# Altium PCB PCB2_other1.PcbDoc
Units mil, origin at the board's own origin, x right, y up, seen from the top; angles counter-clockwise.
Board outline 6000 x 4000 mil, 2 copper layers (Top Layer, Bottom Layer); 10 components, 7 nets, 21 pads, 0 vias.
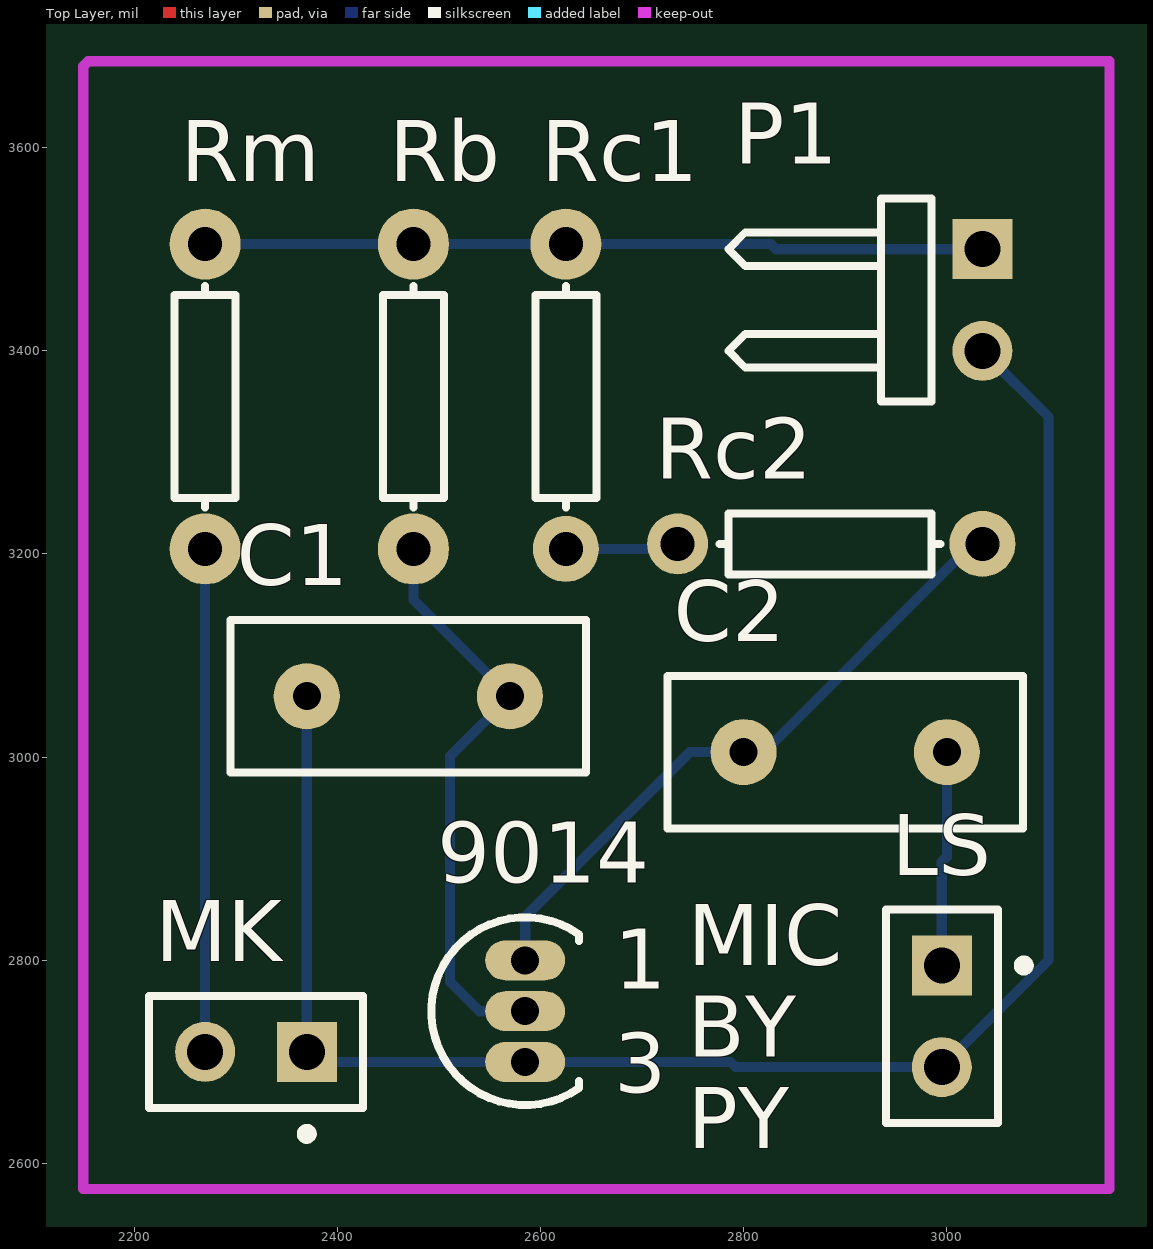
[diagram p0: Top Layer view]
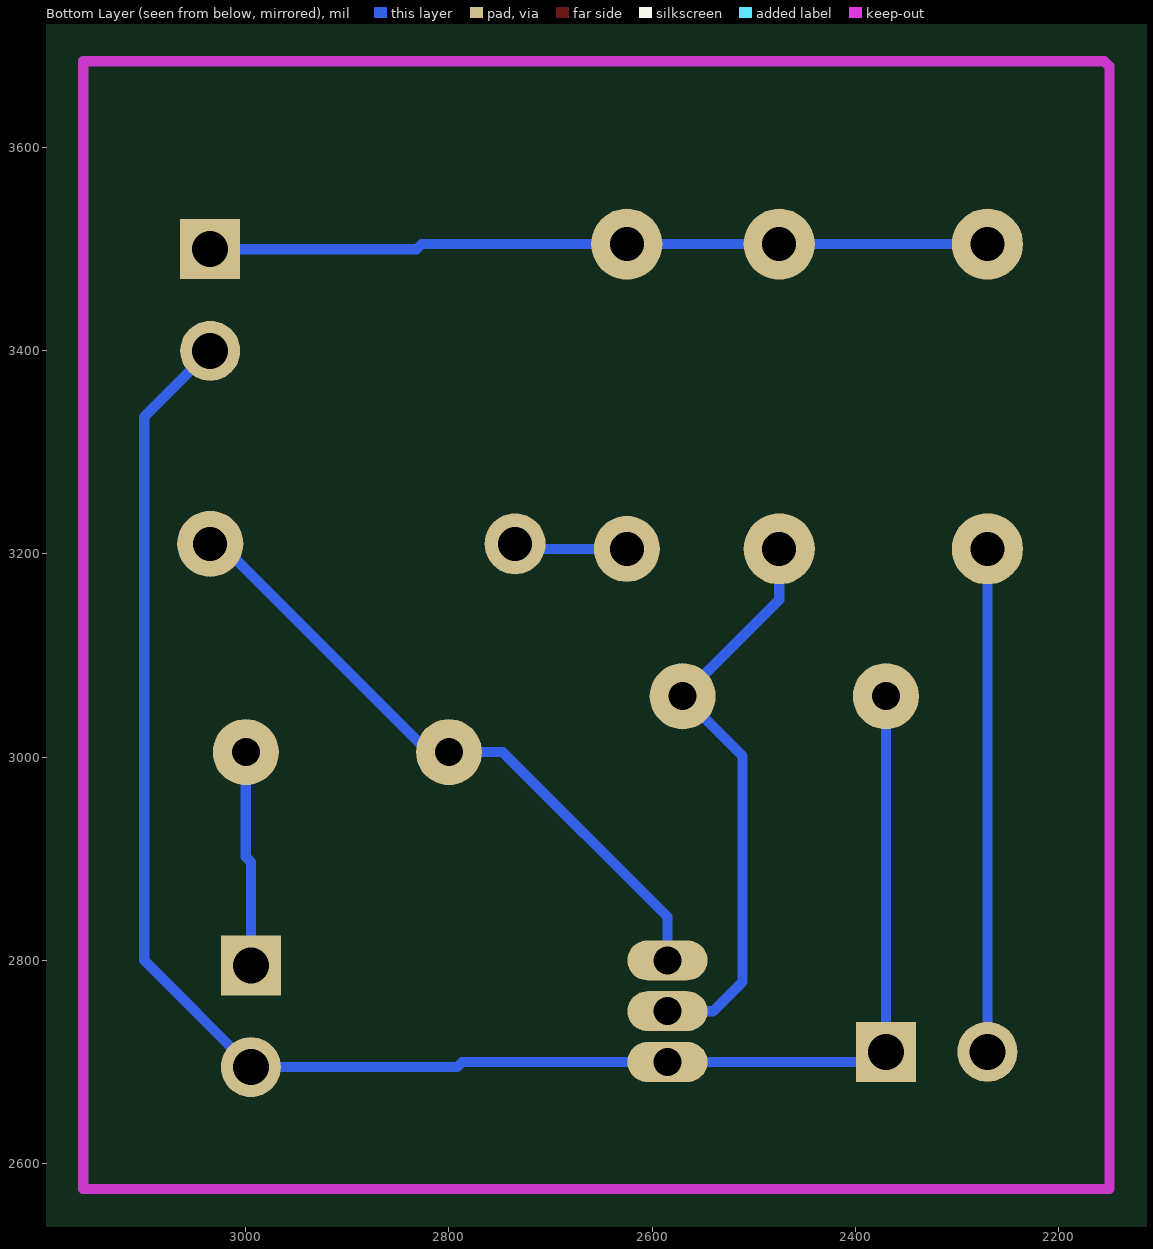
[diagram p1: Bottom Layer view, seen from below]

## Layer stack, top to bottom
Top Solder: solder mask 0.4, Solder Resist, Dk 3.5
Top Layer: signal copper 1.4
Dielectric 1: dielectric 12.6, FR-4, Dk 4.8
Bottom Layer: signal copper 1.4
Bottom Solder: solder mask 0.4, Solder Resist, Dk 3.5

## Board outline
1000,1000 7000,1000 7000,5000 1000,5000

## Design rules (kind name [scope] priority, off if disabled: settings)
Clearance [All] p1: gap=10
PolygonConnect [All] p1: connectstyle=Relief reliefconductorwidth=10 reliefentries=4 polygonreliefangle="90 Angle" airgapwidth=10
RoutingLayers [All] p1: top layer_v5=FALSE bottom layer_v5=TRUE
RoutingVias [All] p1: holewidth=28 width=50 viastyle="Through Hole" minholewidth=28 minwidth=50 maxholewidth=28 maxwidth=50
SolderMaskExpansion [All] p1: expansion=4
Width [All] p1: maxlimit=10 minlimit=10 preferedwidth=10
29 further rules are at their usual default settings.

## Components (designator, comment, footprint, x,y, rotation, side; value= is the part's Value field where it differs from the comment)
9014 "NPN" TO-92 2585,2750 r0 top
C1 "1uf" RAD-0.2 2470,3060 r0 top
C2 "10uf" RAD-0.2 2900,3005 r0 top
LS "Bell" PIN2 2995,2795 r270 top
MK "Mic2" PIN2 2370,2710 r180 top
P1 "Header 2H" HDR1X2H 3035,3500 r270 top
Rb "30k" AXIAL-0.3#1 2475,3355 r270 top
Rc1 "180" AXIAL-0.3#2 2625,3355 r270 top
Rc2 "5.1" AXIAL-0.3#3 2885,3210 r0 top
Rm "2k" AXIAL-0.3#1 2270,3355 r270 top

## Footprints (in the part's own frame and the unit in brackets; to place one, negate y for a bottom-side part, rotate by r counter-clockwise, add the part's x,y. Pads: shape width x height; smd on the part's side, far side on the other; paste and mask are expansions set on the pad)
AXIAL-0.3#1 [mil] "Axial Device, Thru-Hole; 2 Leads; 0.3 in Pin Spacing"
  round 70 hole 33.46: 1(-150,0) 2(150,0)
  silkscreen extent -109,-30 109,30
AXIAL-0.3#2 [mil] "Axial Device, Thru-Hole; 2 Leads; 0.3 in Pin Spacing"
  round 70 hole 33.46: 1(-150,0)
  round 65 hole 33.46: 2(150,0)
  silkscreen extent -109,-30 109,30
AXIAL-0.3#3 [mil] "Axial Device, Thru-Hole; 2 Leads; 0.3 in Pin Spacing"
  round 60 hole 33.46: 1(-150,0)
  round 65 hole 33.46: 2(150,0)
  silkscreen extent -109,-30 109,30
HDR1X2H [mm] "Connector; Header; 2 Position; Right Angle"
  rect 1.5x1.5 hole 0.9: 1(0,0)
  round 1.5 hole 0.9: 2(2.54,0)
  silkscreen extent -1.27,-6.35 3.81,-1.27
PIN2 [mm] "Photosensitive Diode; 2 Leads"
  rect 1.5x1.5 hole 0.9: 1(0,0)
  round 1.5 hole 0.9: 2(2.54,0)
  silkscreen extent -1.4,-1.4 3.94,2.18
RAD-0.2 [mil] "Radial Cap, Thru-Hole; 2 Leads; 0.2 in Pin Spacing"
  round 65 hole 27.56: 1(-100,0) 2(100,0)
  silkscreen extent -175,-75 175,75
TO-92 [mm] "TO, Flat Index; 3 In-Line, Axial Leads; Body Dia. 4.6mm; Leads 0.41 x 0.39 mm (max)"
  oval 2x1 hole 0.7: 1(0,1.27) 2(0,0) 3(0,-1.27)
  silkscreen extent -2.34,-2.34 1.35,2.34

## Part data
9014: "NPN Bipolar Transistor"
C1 C2: library part Cap, "Capacitor"
LS: "Electrical Bell"
MK: "Microphone"
P1: "Header, 2-Pin, Right Angle"
Rb Rc1 Rc2 Rm: library part Res2, "Resistor"

## Nets (pads, with @x,y where several pads share a name; then routed paths per layer and width w, separated by ;. In a path a pad name is that pad's centre, name@x,y a point inside that pad or via, vN(x,y) a via of type N, cw(c..) or ccw(c..) an arc to the next point about the centre after c; other vN are vias at no path point)
GND: 9014.3 C1.1 LS.2 MK.1 P1.2 | length 1756.6
  Bottom Layer w10: C1.1 MK.1 2380,2700 9014.3 2787,2700 2792,2695 LS.2 3100,2800 3100,3335 P1.2
Net9014_1: 9014.1 C2.1 Rc2.2 | length 645
  Bottom Layer w10: 9014.1 2585,2843 2747,3005 C2.1 2820,3005 3025,3210 Rc2.2
Net9014_2: 9014.2 C1.2 Rb.2 | length 575.8
  Bottom Layer w10: Rb.2 2475,3155 C1.2 2511,3001 2511,2779 2540,2750 9014.2
NetC2_2: C2.2 LS.1 | length 212.1
  Bottom Layer w10: LS.1 2995,2897 3000,2902 C2.2
NetMK_2: MK.2 Rm.2 | length 495
  Bottom Layer w10: MK.2 Rm.2
NetP1_1: P1.1 Rb.1 Rc1.1 Rm.1 | length 767.1
  Bottom Layer w10: Rm.1 Rb.1 Rc1.1 2827,3505 2832,3500 P1.1
NetRc1_2: Rc1.2 Rc2.1 | length 112.1
  Bottom Layer w10: Rc1.2 2730,3205 Rc2.1

## Keep-outs
Keep-Out Layer:
  lines w10: 2150,2575 2150,3680 2155,3685 2185,3685 3160,3685 3160,2575 2160,2575 2150,2575

## Silkscreen, mask and mechanical layers (free items; w line width, h text height)
Top Overlay:
  text "MIC / BY / PY" at 2745,2615 h60

## Text inside footprints (layer, text, board x,y; h text height)
9014: Top Overlay "1" at 2672.56,2772.05 h59.05; Top Overlay "3" at 2672.56,2669.88 h59.05